# Altium PCB jlcpcb_patch_test_1.PcbDoc
Units mm, origin at the board's own origin, x right, y up, seen from the top; angles counter-clockwise.
Board outline 80 x 80 mm, 2 copper layers (Top Layer, Bottom Layer), stack 1.571 mm thick; 2 components, 2 nets, 6 pads, 2 vias.
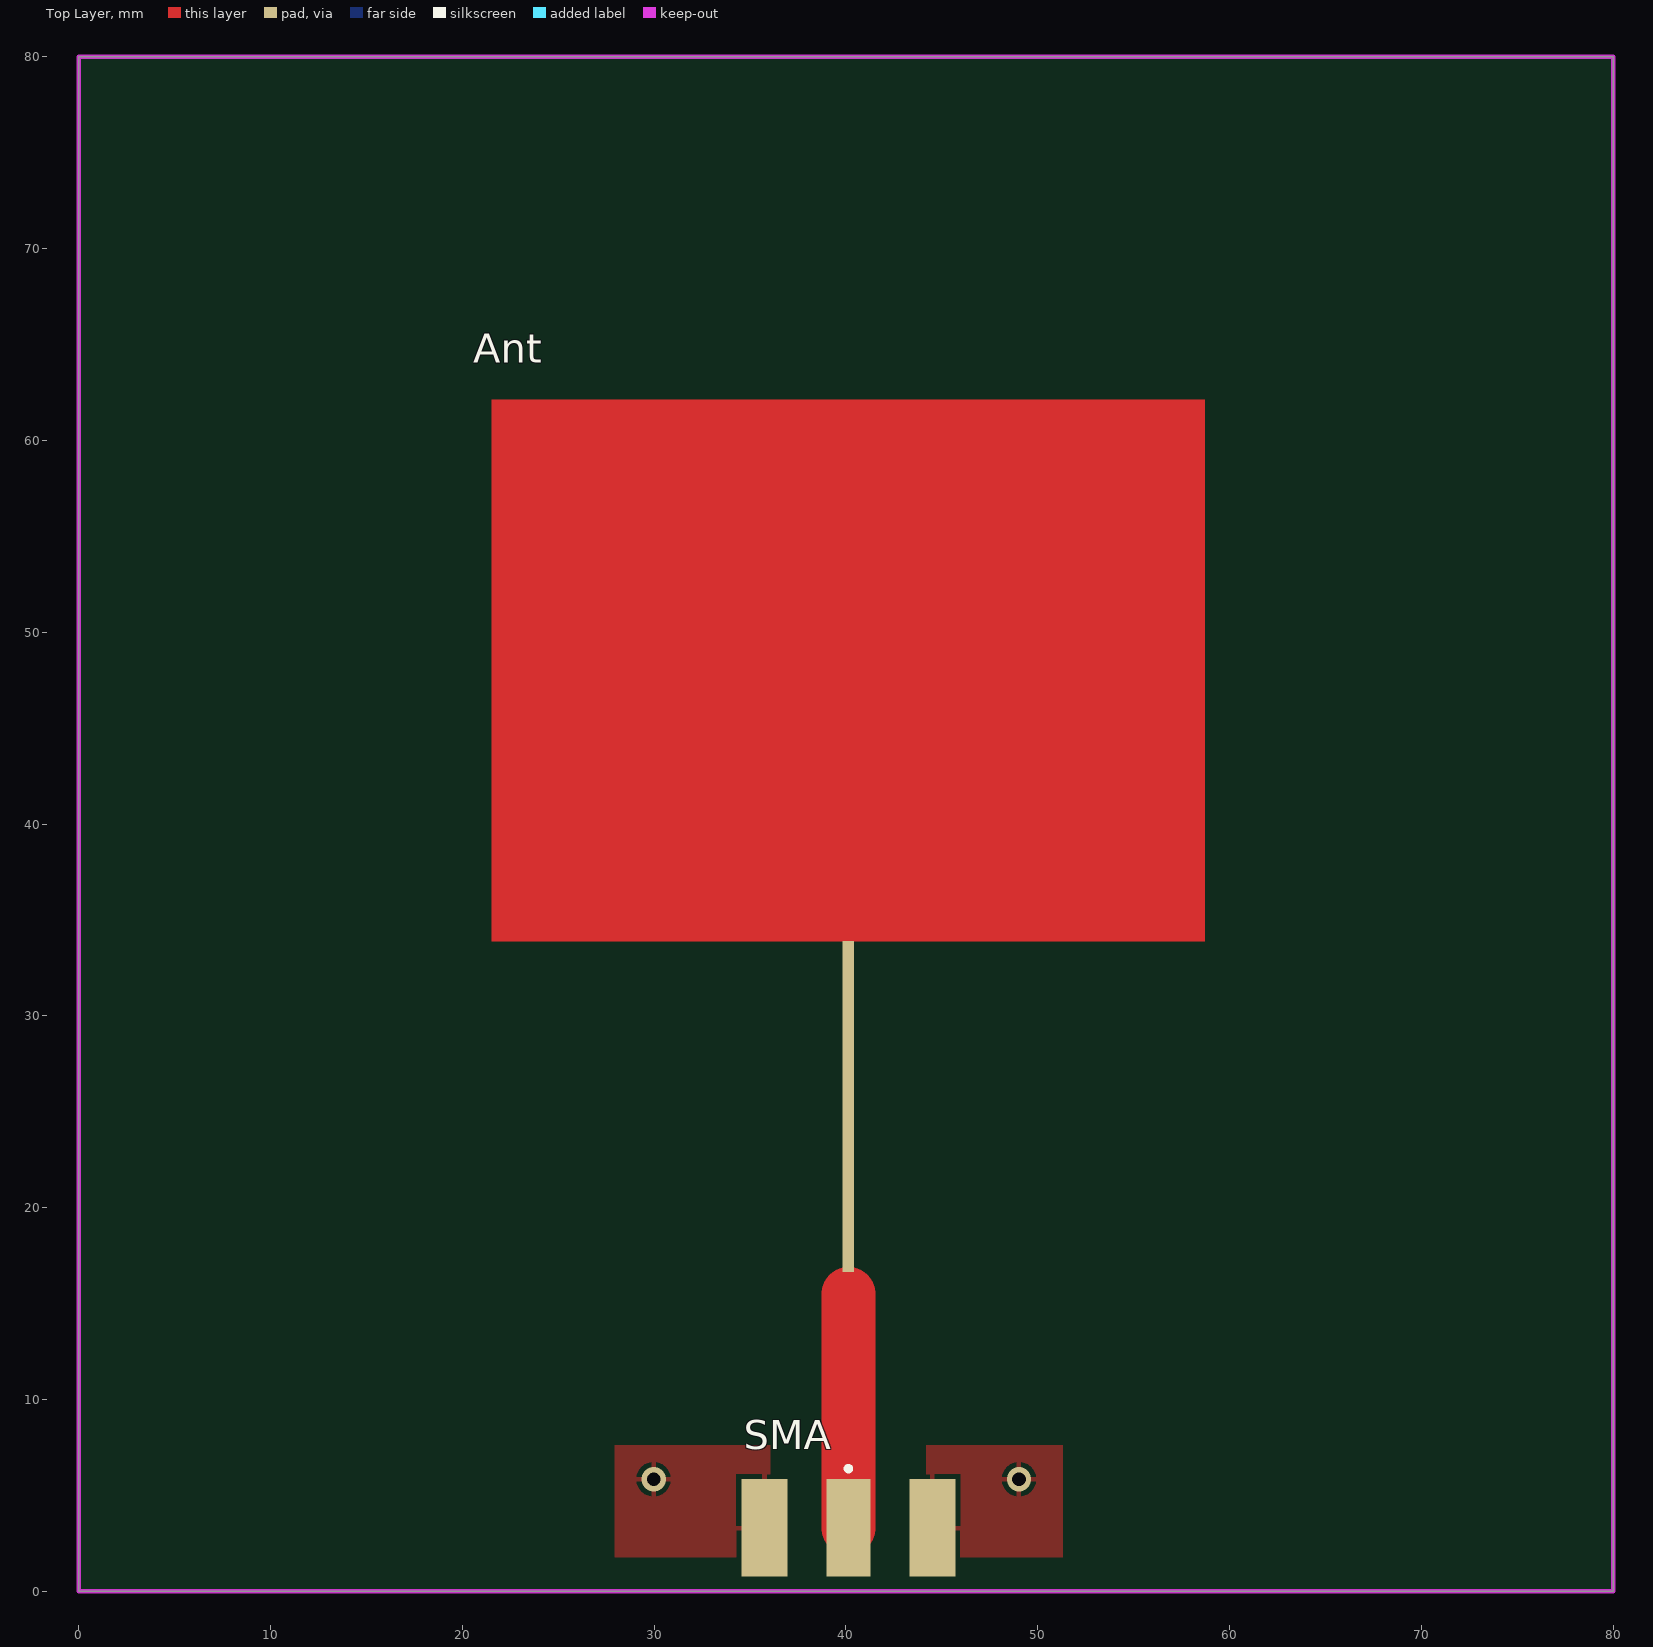
[diagram p0: Top Layer view]
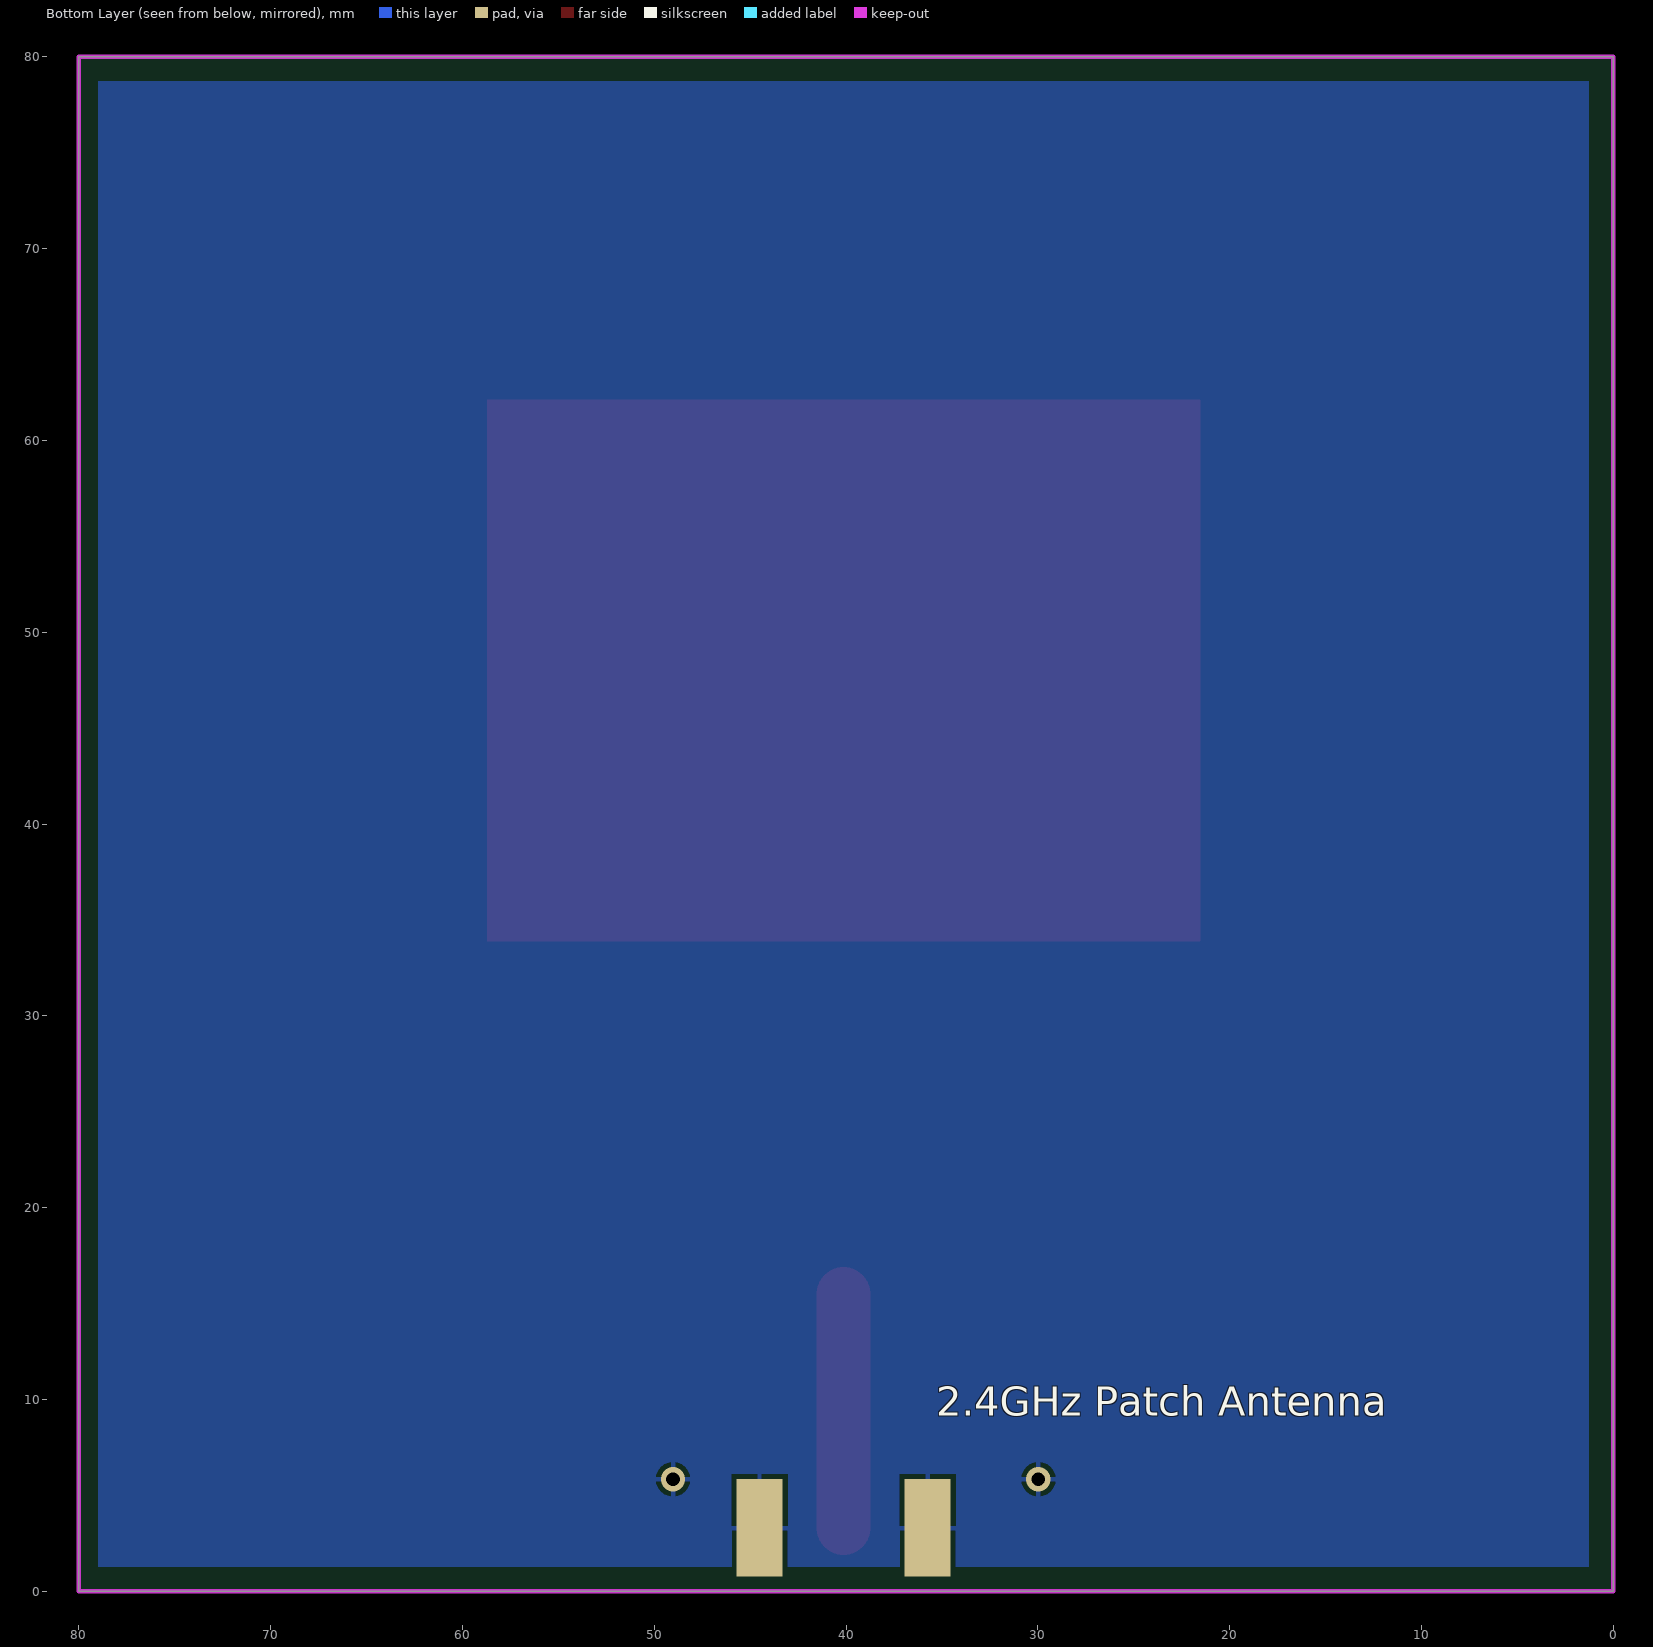
[diagram p1: Bottom Layer view, seen from below]

## Layer stack, top to bottom
Top Solder: solder mask 0.0102, Solder Resist, Dk 3.5
Top Layer: signal copper 0.0356
Dielectric 1: dielectric 1.5, FR-4, Dk 4.8
Bottom Layer: signal copper 0.0356
Bottom Solder: solder mask 0.0102, Solder Resist, Dk 3.5

## Board outline
0,0 0,80 80,80 80,0
cut-out: 38.1,123.825

## Design rules (kind name [scope] priority, off if disabled: settings)
Clearance [All] p1: gap=0.254 ignorepadtopadclearanceinfootprint=FALSE except(0: Arc-Hole Track-Hole SMDPad-Hole THPad-Hole Via-Hole Fill-Hole Poly-Hole Region-Hole Text-Hole)
PolygonConnect [All] p1: connectstyle=Relief reliefconductorwidth=0.254 reliefentries=4 polygonreliefangle="90 Angle" airgapwidth=0.254
RoutingVias [All] p1: holewidth=0.711 width=1.27 viastyle="Through Hole" minholewidth=0.711 minwidth=1.27 maxholewidth=0.711 maxwidth=1.27
SolderMaskExpansion [All] p1: expansion=0.102
Width 2.4GHz [InNet('Net*_RF')] p1: maxlimit=2.9 minlimit=0.254 preferedwidth=2.8 toplayer_minwidth=2.7 bottomlayer_maxwidth=0.254 bottomlayer_prefwidth=0.254 minimp=50.000000 maximp=50.000000 favimp=50.000000 checkconnectedcopper=TRUE
30 further rules are at their usual default settings.

## Components (designator, comment, footprint, x,y, rotation, side; value= is the part's Value field where it differs from the comment)
Ant "2.4GHz Patch Ant" "jlcpcb 2.4GHz" 40.132,48.006 r0 top
SMA "142-0701-801" CINC-142-0701-801_V 40.132,3.3 r270 top

## Footprints (in the part's own frame and the unit in brackets; to place one, negate y for a bottom-side part, rotate by r counter-clockwise, add the part's x,y. Pads: shape width x height; smd on the part's side, far side on the other; paste and mask are expansions set on the pad)
CINC-142-0701-801_V [mil] "SMA Connector, 5-Leads, Body 14.275x9.525mm"
  rect 200x90 smd: 1(0,0)
  rect 200x95 smd: 2(0,172.5) 3(0,-172.5)
  rect 200x95 smd far side: 4(0,172.5) 5(0,-172.5)
  silkscreen extent -127,-5 -117,5, body extent -87,-187 475,188, height 171
"jlcpcb 2.4GHz" [mm]
  rect 0.6x17.25 smd mask+1: RF(0,-22.73)
  Top Layer region: -18.6,-14.125 18.6,-14.125 18.6,14.125 -18.6,14.125
  Top Layer region: -0.381,-0.826

## Part data
SMA: library part CMP-2000-05490-1, "SMA End Launch Jack Receptacle, 50 Ohm, 0 to 18 GHz, -65 to 165 degC, 5-Pin SMD, RoHS, Bulk", Manufacturer=EmersonConnectivitySolutions, Maximum Frequency=18GHz, Operating Temperature Range=-65Cto+165C, Package Description="5-Pin Surface Mount Device, Body 14.275 x 9.525 mm", Body Material=Brass, Body Style=Straight, Brand=Johnson/EmersonConnectivitySolutions, Connector Type=JackPCB, Contact Plating=Gold, Datasheet URL=https://belfuse.com/resources/Johnson/productinformation/pi-142-0701-801.pdf, Datasheet Version=12/2014, Factory Pack Quantity=5, Gender=Jack(Female), Impedance=50Ohms, Manufacturer URL=http://www.cinch.com/, Mounting Technology=SurfaceMount, Orientation=Straight, Package Reference=142-0701-801, Package URL=https://belfuse.com/resources/Johnson/drawings/dr-1420701801.pdf, Product=Connectors, Product Category=RFConnectors/CoaxialConnectors, RF Series=SMA, RoHS=Details, Series=SMA, Termination Style=Solder

## Via types
v1: diameter 1.27, hole 0.711, Top Layer to Bottom Layer, 2 vias

## Nets (pads, with @x,y where several pads share a name; then routed paths per layer and width w, separated by ;. In a path a pad name is that pad's centre, name@x,y a point inside that pad or via, vN(x,y) a via of type N, cw(c..) or ccw(c..) an arc to the next point about the centre after c; other vN are vias at no path point)
GND: SMA.2 SMA.3 SMA.4 SMA.5
  other v1: 29.972,5.842 49.022,5.842
NetAnt_RF: Ant.RF SMA.1 | length 12.2
  Top Layer w2.8: SMA.1 40.132,15.494

## Polygon pours and split planes (outlines as drawn)
no net on Top Solder (solid): 60.198,33.782
no net on Top Solder (solid): 63.373,24.638
no net on Top Solder (solid): 88.392,42.418
GND on Bottom Layer "GND_Plane" (solid, pour order 0): 1.27,78.74 1.27,1.27 78.994,1.27 78.994,78.74
GND on Top Layer "Top Layer-GND" (solid, pour order 4): 44.196,7.62 44.196,1.778 51.308,1.778 51.308,7.62
GND on Top Layer "Top Layer-GND 1" (solid, pour order 2): 27.94,7.62 36.068,7.62 36.068,2.032 36.068,1.778 27.94,1.778

## Keep-outs
Keep-Out Layer:
  lines w0.254: 0,0 80.01,0 80.01,80.01 0,80.01 0,0

## Silkscreen, mask and mechanical layers (free items; w line width, h text height)
Bottom Overlay:
  text "2.4GHz Patch Antenna" at 35.306,9.144 h1.52